# Altium PCB Main.PcbDoc (part 2 of 2)
Units mil, origin at the board's own origin, x right, y up, seen from the top; angles counter-clockwise.
Board outline 5000 x 4200 mil, 4 copper layers (Top Layer, Gnd 1, Power, Gnd 2), stack 62.4 mil thick; 161 components, 127 nets, 645 pads, 533 vias.
Unrouted connection lines stored in the file: 1.
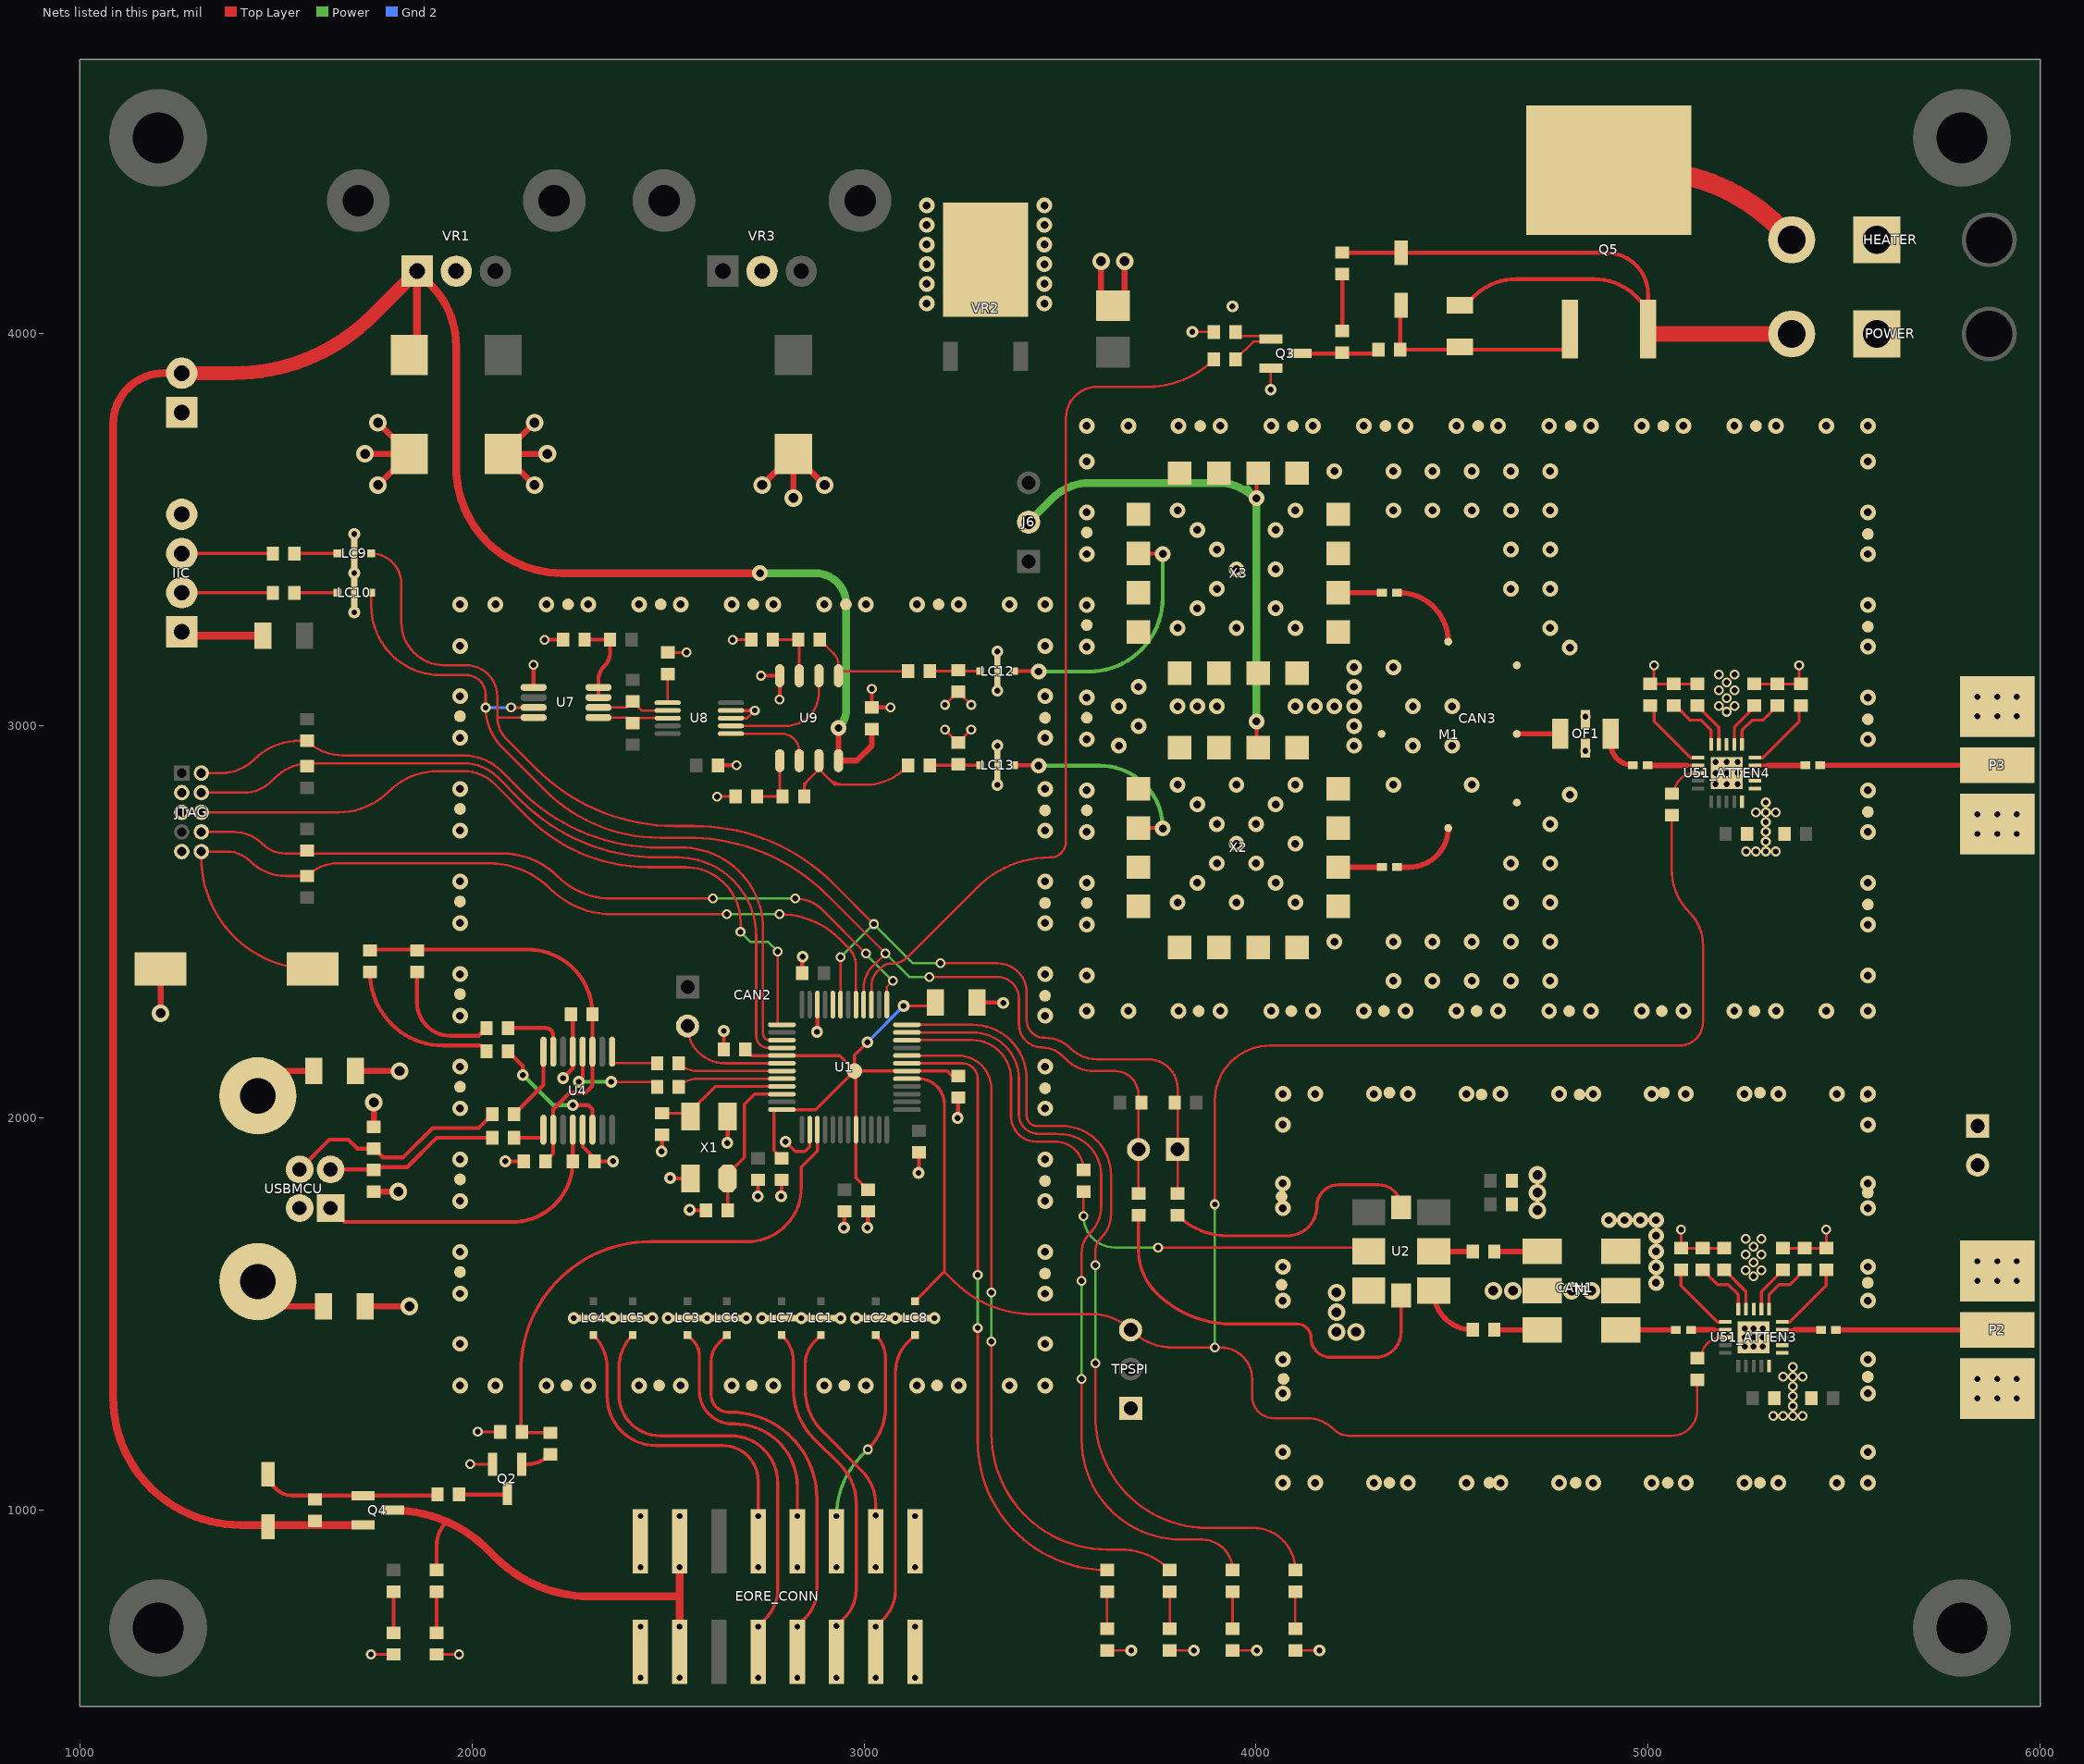
[diagram p4: the nets of this part, all layers, seen from the top]

## Via types
v1: diameter 40, hole 20, Top Layer to Gnd 2, tented both sides, 278 vias
v2: diameter 25, hole 15, Top Layer to Gnd 2, tented both sides, 147 vias
v3: diameter 30, hole 15, Top Layer to Gnd 2, tented both sides, 58 vias
v4: diameter 45, hole 25, Top Layer to Gnd 2, tented both sides, 31 vias
v5: diameter 25, hole 15, Top Layer to Gnd 2, 18 vias
v6: diameter 50, hole 30, Top Layer to Gnd 2, tented both sides, 1 vias

## Nets (pads, with @x,y where several pads share a name; then routed paths per layer and width w, separated by ;. In a path a pad name is that pad's centre, name@x,y a point inside that pad or via, vN(x,y) a via of type N, cw(c..) or ccw(c..) an arc to the next point about the centre after c; other vN are vias at no path point) (continued)
DATA: LC8.1 R57_ATTEN3.2 R57_ATTEN4.2 TPSPI.3 U1.17 | length 5427.6
  Top Layer w6: 3205,1608.31 3230,1583.31 ccw(c3431.12,1784.43) 3431.12,1500 3583.43,1500 cw(c3583.43,1363.43) TPSPI.3@3680,1460 ccw(c3788.64,1568.64) 3788.64,1415 v2(3895,1415) 3910,1415 cw(c3910,1335) 3990,1335 3990,1290 ccw(c4045,1290) 4045,1235 4127.57,1235 cw(c4127.57,1132.57) 4200,1205 ccw(c4236.21,1241.21) 4236.21,1190 5060,1190 ccw(c5060,1255) 5125,1255 R57_ATTEN3.2@5125,1332.44 ; v2(3895,1780) 3895,2045 cw(c4035,2045) 4000.27,2180.62 cw(c4035,2045) 4035,2185 5080,2185 ccw(c5080,2245) 5140,2245 5140,2440.5 ccw(c5020.5,2440.5) 5105,2525 cw(c5213.64,2633.64) 5060,2633.64 R57_ATTEN4.2@5060,2772.44
  Top Layer w8: U1.17@3109.45,2100.47 3139.53,2100.47 cw(c3139.53,2035) 3174.91,2090.09 cw(c3139.53,2035) 3185.35,2081.77 cw(c3139.53,2035) 3205,2035 3205,1608.31 LC8.1@3130,1533.31
  Power w6: v2(3895,1415) v2(3895,1780)
GND: C4.1 C5.1 C6.1 C7.1 C8.1 C9.1 C10.1 C11.1 C14.1 C15.1 C16.1 C18.1 C19.1 C20.1 C21.1 C22.1 C54_ATTEN3.1 C54_ATTEN4.1 C56_ATTEN3.1 C56_ATTEN4.1 CAN1.1 CAN2.1 CAN3.1 CB6.2 CB7.2 CB8.2 CBP2.2 CR3.2 CR4.2 CU1.1 CU2.1 CU3.1 CX1.1 CX2.1 EORE_CONN.1 EORE_CONN.2 EORE_CONN.15 EORE_CONN.16 GND.1 GND.2 HEATER.1 IIC.4 J5.1 JTAG.3 JTAG.5 JTAG.9 LC1.2 LC2.2 LC3.2 LC4.2 LC5.2 LC6.2 LC7.2 LC8.2 LC9.2 LC10.2 LC12.2 LC13.2 M1.4 M1.5 M1.6 OF1.2 OF1.4 P2.2 P3.2 Pow1.1 POWER.1 Q2.2 Q3.2 R19.2 R21.1 R45.1 R51_ATTEN3.2 R51_ATTEN4.2 R52_ATTEN3.2 R52_ATTEN4.2 R53_ATTEN3.2 R53_ATTEN4.2 R54_ATTEN3.2 R54_ATTEN4.2 R55_ATTEN3.2 R55_ATTEN4.2 R56_ATTEN3.2 R56_ATTEN4.2 RC3.1 RC4.1 RD8.2 RD9.2 RD10.2 RESET.2 RG2.1 RL1.2 RL2.2 RLED8.2 T1.2 T1.3 T1.5 TPSPI.1 U1.2 U1.34 U2.3 U4.5 U4.13 U7.1 U8.3 U8.4 U9.4 U51_ATTEN3.10 U51_ATTEN3.11 U51_ATTEN3.12 U51_ATTEN3.18 U51_ATTEN3.21 U51_ATTEN4.10 U51_ATTEN4.11 U51_ATTEN4.12 U51_ATTEN4.18 U51_ATTEN4.21 USBMCU.4 VR1.2 VR2.4 VR3.2 X1.2 X1.4 X2.1 X2.3 X2.4 X2.5 X2.6 X2.7 X2.8 X2.9 X2.11 X2.12 X2.13 X2.15 X2.16 X3.1 X3.3 X3.4 X3.5 X3.6 X3.7 X3.8 X3.9 X3.11 X3.12 X3.13 X3.15 X3.16 | length 4900.6
  Top Layer w6: RD8.2@3620,642.44 v3(3681.57,642.44) ; RD9.2@3780,642.44 v3(3841.57,642.44) ; v3(3837.44,4005) R45.1@3892.44,4005 ; RL2.2@3940,642.44 v3(4001.57,642.44) ; v3(4037.6,3857.6) Q3.2@4037.6,3912.6 ; RL1.2@4100,642.44 v3(4161.57,642.44)
  Top Layer w7: v2(1742.56,632.44) RLED8.2@1800,632.44 ; RD10.2@1910,632.44 v2(1967.44,632.44) ; v2(1995.16,1117.4) Q2.2@2052.6,1117.4 ; v2(2015,1200) RG2.1@2072.44,1200 ; J5.1@2500,3187.56 v2(2547.44,3187.56) ; v2(2625,2820) R21.1@2672.44,2820 ; U8.3@2660.71,3020 2701.73,3020 v2(2721.42,3039.68) ; v2(2665,3220) R19.2@2712.44,3220 ; v2(3206.45,2991.1) C21.1@3240,2957.56 v2(3273.55,2991.1) ; v2(3206.45,3053.9) C22.1@3240,3087.44 v2(3273.55,3053.9) ; v2(5015,3155) 5015,3107.56 R55_ATTEN4.2@5125,3107.56 ; v2(5084,1715.77) R54_ATTEN3.2@5084,1668.33 R55_ATTEN3.2@5194,1668.33 ; R51_ATTEN4.2@5275,3107.56 5385,3107.56 v2(5385,3155) ; R51_ATTEN3.2@5344,1668.33 R52_ATTEN3.2@5454,1668.33 v2(5454,1715.77)
  Top Layer w8: U8.4@2660.71,3039.68 v2(2721.42,3039.68) ; v3(2800,1940) 2825,1915 2850,1915 2861.42,1926.42 U1.2@2861.42,1970.55
  Top Layer w10: v3(2085,1890) CU2.1@2132.44,1890 ; U7.1@2157.32,3098.39 v2(2157.32,3155.83) ; v2(2185,3220) C18.1@2232.44,3220 ; v3(2232.5,2101.97) 2257.5,2126.97 U4.5@2257.5,2169.41 CU3.1@2257.5,2259.94 ; U4.13@2282.5,1970.59 2282.5,1927.5 CU1.1@2310,1900 ; CU1.1@2312.56,1890 v3(2360,1890) ; v3@2485,1915.43 CX2.1@2485,1957.44 ; v3@2505.75,1846.26 X1.4@2557.76,1846.26 ; v3@2555.43,1765 CX1.1@2597.44,1765 ; C19.1@2627.56,2900 v2(2675,2900) ; C14.1@2642.44,2175 v3(2642.44,2222.44) ; v3@2652.24,1936.73 X1.2@2652.24,2003.74 ; v3@2730,1800.43 C6.1@2730,1842.44 ; v2(2737.56,3128.27) U9.4@2785,3128.27 v2(2785,3067.56) ; v3@2790,1800.43 C11.1@2790,1842.44 ; C15.1@2842.44,2370 v3@2842.44,2412.01 ; v3@2881.1,2220 U1.34@2881.1,2289.45 ; v3@2950,1720.43 C7.1@2950,1762.44 ; v3@3010,1720.43 C8.1@3010,1762.44 ; v2(3020,3095) C20.1@3020,3047.56 v2(3067.44,3047.56) ; v3@3140,1860.43 C16.1@3140,1912.44 ; v3@3240,2000.43 C10.1@3240,2052.44 ; C9.1@3288.15,2295 v3@3355.16,2295
  Top Layer w15: v4(1206.1,2267.44) RESET.2@1206.1,2380 ; RC3.1@1703.15,2120 v4(1815.71,2120) ; v4(1727.44,3694.02) CB8.2@1840,3694.02 ; RC4.1@1728.15,1520 v4(1840.71,1520) ; CR3.2@1750,1812.44 v4(1812.56,1812.44) ; CR4.2@1750,1977.56 v4(1750,2040.12) ; v4(1760.41,3614.42) CB8.2@1840,3694.02 ; v4(1760.41,3773.61) CB8.2@1840,3694.02 ; v4(2159.59,3614.42) CB7.2@2080,3694.02 ; v4(2159.59,3773.61) CB7.2@2080,3694.02 ; v4(2192.56,3694.02) CB7.2@2080,3694.02 ; v4(2740.41,3614.42) CB6.2@2820,3694.02 ; v4(2820,3581.46) CB6.2@2820,3694.02 ; v4(2899.59,3614.42) CB6.2@2820,3694.02 ; CBP2.2@3604.76,4072.83 v4(3604.76,4185.39) ; CBP2.2@3664.76,4072.83 v4(3664.76,4185.39)
  other v1: 4068.19,1069.68 4150.87,1069.68 4300.47,1069.68 4387.09,1069.68 4536.69,1069.68 4623.31,1069.68 4772.91,1069.68 4859.53,1069.68 5009.13,1069.68 5095.75,1069.68 5245.35,1069.68 5331.97,1069.68 5481.57,1069.68 5560.31,1069.68 4068.19,1148.43 5560.31,1148.43 4068.19,1298.03 5560.31,1298.03 1969.68,1318.19 2060.24,1318.19 2190.16,1318.19 2296.46,1318.19 2426.38,1318.19 2532.68,1318.19 2662.6,1318.19 2768.9,1318.19 2898.82,1318.19 3005.12,1318.19 3135.04,1318.19 3241.34,1318.19 3371.26,1318.19 3461.81,1318.19 4068.19,1384.65 5560.31,1384.65 1969.68,1424.49 3461.81,1424.49 4068.19,1534.25 5560.31,1534.25 1969.68,1552.44 3461.81,1552.44 5020,1580 5020,1620 4068.19,1620.87 5560.31,1620.87 1969.68,1658.74 3461.81,1658.74 5020,1660 5020,1700 4900,1740 4940,1740 4980,1740 5020,1740 4068.19,1770.47 5560.31,1770.47 1969.68,1788.66 3461.81,1788.66 4068.19,1833.46 5560.31,1833.46 1969.68,1894.96 3461.81,1894.96 4068.19,1983.07 5560.31,1983.07 1969.68,2024.88 3461.81,2024.88 4068.19,2061.81 4150.87,2061.81 4300.47,2061.81 4387.09,2061.81 4536.69,2061.81 4623.31,2061.81 4772.91,2061.81 4859.53,2061.81 5009.13,2061.81 5095.75,2061.81 5245.35,2061.81 5331.97,2061.81 5481.57,2061.81 5560.31,2061.81 1969.68,2131.18 3461.81,2131.18 1969.68,2261.1 3461.81,2261.1 3568.19,2273.19 3674.49,2273.19 3802.44,2273.19 3908.74,2273.19 4038.66,2273.19 4144.96,2273.19 4274.88,2273.19 4381.18,2273.19 4511.1,2273.19 4617.4,2273.19 4747.32,2273.19 4853.62,2273.19 4983.54,2273.19 5089.84,2273.19 5219.76,2273.19 5326.06,2273.19 5454.02,2273.19 5560.31,2273.19 4350,2350 4450,2350 4550,2350 4650,2350 4750,2350 3568.19,2363.74 5560.31,2363.74 1969.68,2367.4 3461.81,2367.4 4200,2450 4350,2450 4450,2450 4550,2450 4650,2450 4750,2450 3568.19,2493.66 5560.32,2493.66 1969.68,2497.32 3461.81,2497.32 3800,2550 3950,2550 4100,2550 4650,2550 4750,2550 3568.19,2599.96 3850,2600 4050,2600 5560.32,2599.96 1969.68,2603.62 3461.81,2603.62 3900,2650 4000,2650 4650,2650 4750,2650 3950,2700 4100,2700 3568.19,2729.88 5560.32,2729.88 1969.68,2733.54 3461.81,2733.54 3900,2750 4000,2750 4750,2750 3850,2800 4050,2800 4800,2825 3568.19,2836.18 5560.32,2836.18 1969.68,2839.84 3461.81,2839.84 3800,2850 3950,2850 4100,2850 4350,2850 4550,2850 3650,2950 4250,2950 4400,2950 4500,2950 3568.19,2966.1 5560.32,2966.1 1969.68,2969.76 3461.81,2969.76 3700,3000 4250,3000 3650,3050 3800,3050 3850,3050 3900,3050 4100,3050 4150,3050 4200,3050 4250,3050 4400,3050 4500,3050 3568.19,3072.4 5560.32,3072.4 1969.68,3076.06 3461.81,3076.06 3700,3100 4250,3100 4250,3150 4350,3150 4800,3200 3568.19,3202.32 5560.32,3202.32 1969.68,3204.02 3461.81,3204.02 3800,3250 3950,3250 4100,3250 4750,3250 3850,3300 4050,3300 3568.19,3308.62 5560.32,3308.62 1969.69,3310.32 2060.24,3310.32 2190.16,3310.32 2296.46,3310.32 2426.38,3310.32 2532.68,3310.32 2662.6,3310.32 2768.9,3310.32 2898.82,3310.32 3005.12,3310.32 3135.04,3310.32 3241.34,3310.32 3371.26,3310.32 3461.81,3310.31 3900,3350 4650,3350 4750,3350 3950,3400 4050,3400 3568.19,3438.54 5560.32,3438.54 3900,3450 4650,3450 4750,3450 3850,3500 4050,3500 3568.19,3544.84 5560.32,3544.84 3800,3550 4100,3550 4350,3550 4450,3550 4550,3550 4650,3550 4750,3550 4200,3650 4350,3650 4450,3650 4550,3650 4650,3650 4750,3650 3568.19,3674.76 5560.31,3674.76 3568.19,3765.32 3674.49,3765.32 3802.44,3765.32 3908.74,3765.32 4038.66,3765.32 4144.96,3765.32 4274.88,3765.32 4381.18,3765.32 4511.1,3765.32 4617.4,3765.32 4747.32,3765.32 4853.62,3765.32 4983.54,3765.32 5089.84,3765.32 5219.76,3765.32 5326.06,3765.32 5454.02,3765.32 5560.31,3765.31 3160,4077.8 3460,4077.8 3160,4127.8 3460,4127.8 3160,4177.8 3460,4177.8 3160,4227.8 3460,4227.8 3160,4277.8 3460,4277.8 3160,4327.8 3460,4327.8
  other v2: 2430,573 3130,573 2430,703 3130,703 2430,855 3130,855 2430,985 3130,985 5319,1240.77 5344,1240.77 5369,1240.77 5394,1240.77 5369,1265.77 5369,1290.77 5369,1315.77 5344,1340.77 5369,1340.77 5394,1340.77 5369,1365.77 5269,1597.07 5249,1612.07 5289,1612.07 5269,1632.07 5249,1652.07 5289,1652.07 5269,1672.07 5249,1692.07 5289,1692.07 5250,2680 5275,2680 5300,2680 5325,2680 5300,2705 5300,2730 5300,2755 5275,2780 5300,2780 5325,2780 5300,2805 4840,2936.5 4840,3023.5 5200,3036.3 5180,3051.3 5220,3051.3 5200,3071.3 5180,3091.3 5220,3091.3 5200,3111.3 5180,3131.3 5220,3131.3
  other v3: 2260,1490 2360,1490 2460,1490 2500,1490 2600,1490 2700,1490 2740,1490 2840,1490 2940,1490 2980,1490 3080,1490 3180,1490 2948.9,1720.43 3008.9,1720.43 2555.43,1766.1 2728.9,1800.43 2788.9,1800.43 2505.75,1847.36 3138.9,1860.43 2483.9,1915.43 2651.14,1936.73 3238.9,2000.43 2880,2220 3355.16,2293.9 2843.54,2412.01 3340,2850 3340,2950 3340,3090 3340,3190 1700,3290 1700,3390 1700,3490 3939.76,4069.9
  other v4: 4205,1455 4255,1455 4205,1505 4205,1555 4605,1560 4655,1560 4805,1560 4855,1560 4717.56,1765 4717.56,1810 4717.56,1855
  other v5: 5246,1417.77 5269,1417.77 5292,1417.77 5246,1440.77 5269,1440.77 5292,1440.77 5246,1463.77 5269,1463.77 5292,1463.77 5172,2852 5200,2852 5228,2852 5172,2880 5200,2880 5228,2880 5172,2908 5200,2908 5228,2908
HEAT: R43.1 U1.27 U1.32 | length 2219.1
  Top Layer w6: U1.27@3018.9,2289.45 3018.9,2335 cw(c3078.9,2335) 3030.6,2370.6 3043.17,2383.17 cw(c3070.1,2356.23) 3070.1,2394.33 ccw(c3070.1,2452.8) 3078.96,2395 ccw(c3070.1,2452.8) 3111.45,2411.45 3287.22,2587.22 cw(c3475,2399.44) 3475,2665 ccw(c3475,2705) 3515,2705 3515,3785 cw(c3595,3785) 3595,3865 3723.45,3865 ccw(c3723.45,4104) R43.1@3892.44,3935
HEAT_PWR: D17.1 D18.1 POWER.2 Q5.3 R49.2 | length 1831.8
  Top Layer w10: D17.1@4220,4207.56 4220,4206.93 D18.1@4370,4206.93 4893.07,4206.93 cw(c4893.07,4100) 5000,4100 Q5.3@5000,4065 ; R49.2@4520,4073.15 ccw(c4520,4104.9) 4542.45,4082.45 4555,4095 cw(c4663.64,3986.36) 4663.64,4140 4861.36,4140 cw(c4861.36,3986.36) 4970,4095 Q5.3@5000,4065 ; Q5.3@5000,4011.97 Q5.3@5000,4065
  Top Layer w40: Q5.3@5000,4011.97 5000,4000 POWER.2@5366,4000
LV_CLK: EORE_CONN.12 LC2.1 | length 504.2
  Top Layer w8: v2(3010,1155) ccw(c2901.36,1263.64) 3055,1263.64 3055,1386.34 ccw(c2969.64,1386.34) 3030.08,1446.62 ccw(c2969.64,1386.34) LC2.1@3030,1446.69
  Power w8: v2(2930,985) cw(c3147.28,985) 2993.64,1138.64 v2(3010,1155)
  other v2: 2930,855
LV_CS_1: EORE_CONN.14 LC1.1 | length 601.3
  Top Layer w8: LC1.1@2890,1446.69 2875,1431.69 ccw(c2935.36,1371.34) 2874.96,1431.66 ccw(c2935.36,1371.34) 2850,1371.34 2850,1308.64 ccw(c3003.64,1308.64) 2895,1200 2994.64,1100.36 cw(c2909.29,1015) 3030,1015 EORE_CONN.14@3030,921
  other v2: 3030,855 3030,987
LV_CS_2: EORE_CONN.11 LC7.3 | length 819.4
  Top Layer w8: LC7.3@2790,1446.69 2794.05,1442.64 cw(c2731.42,1380) 2820,1380 2820,1308.49 ccw(c2997.43,1308.49) 2871.97,1183.03 2940,1115 cw(c2843.43,1018.43) 2980,1018.43 2980,797.43 cw(c2877.57,797.43) 2950,725 v2(2930,705)
  other v2: 2930,573
LV_CS_3: EORE_CONN.9 LC6.1 | length 927.8
  Top Layer w8: 2629.98,1426.67 ccw(c2678.28,1378.41) 2610,1378.41 2610,1295 ccw(c2655,1295) 2655,1250 2660.07,1250 cw(c2660.07,1030.24) 2792.09,1205.92 cw(c2660.07,1030.24) 2879.83,1030.24 2879.83,1029.99 cw(c2641.01,1021.01) 2880,1021.01 2880,797.43 cw(c2777.57,797.43) 2850,725 EORE_CONN.9@2830,705 ; 2630,1426.69 LC6.1@2650,1446.69
  other v2: 2830,573 2830,703
LV_SW_1: EORE_CONN.7 LC5.1 | length 1075.8
  Top Layer w8: LC5.1@2410,1446.69 ccw(c2494.5,1362.2) LC5.1@2410,1446.69 ccw(c2494.5,1362.2) 2375,1362.2 2375,1295 ccw(c2480,1295) 2480,1190 2660,1190 cw(c2660,1070) 2780,1070 2780,797.43 cw(c2677.57,797.43) 2750,725 EORE_CONN.7@2730,705
  other v2: 2730,573 2730,703
LV_SW_2: EORE_CONN.8 LC4.3 | length 827.8
  Top Layer w8: LC4.3@2310,1446.69 cw(c2225.5,1362.2) 2345,1362.2 2345,1290 ccw(c2470,1290) 2368.55,1216.97 ccw(c2470,1290) 2470,1165 2640,1165 cw(c2640,1075) 2730,1075 v2(2730,985) EORE_CONN.8@2730,921
  other v2: 2730,855
LV_SW_3: EORE_CONN.10 LC3.3 | length 680.8
  Top Layer w8: LC3.3@2550,1446.69 2565,1431.69 cw(c2528.79,1395.48) 2580,1395.48 2580,1305 ccw(c2665,1305) 2665,1220 2670,1220 cw(c2670,1060) 2830,1060 v2(2830,985) EORE_CONN.10@2830,921
  other v2: 2830,855
MIXERV+: J6.2 X2.14 X3.14 | length 1350.5
  Top Layer w10: X2.14@4001.1,2950 v1(4001.1,3012.01) ; v1(4001.1,3580.79) X3.14@4001.1,3642.79
  Power w20: J6.2@3420,3520 3481.11,3581.11 cw(c3575,3487.22) 3575,3620 3904.61,3620 cw(c3904.61,3493.65) v1@3993.95,3582.99 ; 3977.88,3604.01 ccw(c4083.26,3667.95) v1@3993.95,3582.99 ; v1@3996.1,3580.79 cw(c4083.26,3667.95) v1@3993.95,3582.99 ; v1@3998.6,3583.29 v1(4001.1,3580.79) v1(4001.1,3012.01) v1@4001.1,3007.01
ND_EN: RG1.1 RG2.2 U1.3 | length 1375
  Top Layer w8: RG2.2@2125,1200 2125,1355 cw(c2455,1355) 2455,1685 2702.5,1685 ccw(c2702.5,1822.5) 2776.81,1706.81 ccw(c2702.5,1822.5) 2818.19,1748.19 ccw(c2702.5,1822.5) 2840,1822.5 2840,1875 2881.1,1916.1 U1.3@2881.1,1970.55 ; RG2.2@2127.56,1200 ccw(c2133.45,1205.89) 2133.45,1197.56 RG1.1@2200,1197.56
NetC1_1: C1.1 U2.4 | length 156.9
  Top Layer w13.45: U2.4@4452.68,1559.76 ccw(c4552.44,1559.76) C1.1@4552.44,1460
  Top Layer w30: U2.4@4452.68,1559.76 U2.4@4452.68,1560
NetC1_2: C1.2 T1.6 | length 110
  Top Layer w13.45: C1.2@4620,1460 T1.6@4730,1460
NetC2_1: C2.1 U2.5 | length 99.8
  Top Layer w13.45: U2.5@4452.68,1660 C2.1@4552.44,1660
NetC2_2: C2.2 T1.4 | length 105
  Top Layer w13.45: 4625,1660 T1.4@4730,1660
NetC18_2: C18.2 R16.1 U7.7 U7.8 | length 220
  Top Layer w10: C18.2@2287.56,3220 R16.1@2352.44,3220 2352.44,3188.49 cw(c2301.63,3188.49) 2337.56,3152.56 ccw(c2373.49,3116.63) 2322.68,3116.63 U7.7@2322.68,3072.8
NetC21_2: C21.2 LC13.1 R24.1 | length 129.1
  Top Layer w8: R24.1@3167.56,2900 LC13.1@3296.69,2900
NetC22_2: C22.2 LC12.1 R23.1 | length 129.1
  Top Layer w8: R23.1@3167.56,3140 LC12.1@3296.69,3140
NetC28_1: C28.1 T1.1 | length 141
  Top Layer w13.45: T1.1@4930,1460 C28.1@5070.98,1460
NetC30_1: C30.1 OF1.3 | length 112.5
  Top Layer w13.45: OF1.3@4904,2980 4904,2956.98 ccw(c4960.98,2956.98) C30.1@4960.98,2900
NetC32_2: C32.2 M1.1 | length 202.3
  Top Layer w13.45: C32.2@4359.02,3340 4365,3340 cw(c4365,3215) M1.1@4490,3215
NetC33_2: C33.2 M1.2 | length 188.1
  Top Layer w13.45: C33.2@4359.02,2640 4390,2640 ccw(c4390,2740) M1.2@4490,2740
NetCU1_2: CU1.2 U4.12 USBMCU.1 | length 814.7
  Top Layer w10: USBMCU.1@1639.37,1770.79 1675.16,1735 2102.5,1735 ccw(c2102.5,1890) 2245.71,1830.71 ccw(c2102.5,1890) 2257.5,1890 U4.12@2257.5,1970.59
  Top Layer w25: USBMCU.1@1638.14,1758.14 ccw(c1573.58,1770.79) USBMCU.1@1639.37,1770.79
NetCX1_2: CX1.2 U1.46 X1.1 | length 394.2
  Top Layer w8: CX1.2@2652.56,1765 2652.24,1765.32 X1.1@2652.24,1846.26 2652.24,1857.24 2695,1900 2695,2035 2721.1,2061.1 U1.46@2790.55,2061.1
NetCX2_2: CX2.2 U1.45 X1.3 | length 333.8
  Top Layer w8: CX2.2@2485,2012.56 2552.56,2012.56 2620.79,2080.79 U1.45@2790.55,2080.79
NetD1_1: D1.1 U1.24 | length 2139.2
  Top Layer w6: U1.24@3109.45,2238.27 3276.73,2238.27 cw(c3276.73,2100) 3415,2100 3415,2006.31 ccw(c3441.31,2006.31) 3441.31,1980 3505,1980 cw(c3505,1855) 3567.89,1963.03 cw(c3505,1855) 3630,1855 3630,1755.36 cw(c3544.64,1755.36) 3605,1695 ccw(c3641.21,1658.79) 3590,1658.79 v2(3590,1625) ; v2(3590,1375) 3590,1240 ccw(c3875,1240) 3708.14,1008.95 ccw(c3875,1240) 3875,955 3992.56,955 cw(c3992.56,847.56) D1.1@4100,847.56
  Power w6: v2(3590,1375) v2(3590,1625)
NetD1_2: D1.2 RL1.1 | length 92.4
  Top Layer w6: RL1.1@4100,697.56 D1.2@4100,790
NetD2_1: D2.1 U1.23 | length 2004.2
  Top Layer w6: U1.23@3109.45,2218.58 3276.42,2218.58 cw(c3276.42,2100) 3395,2100 3395,2010 ccw(c3445,2010) 3445,1960 3480,1960 cw(c3480,1685) 3500.19,1959.26 cw(c3500.19,1854.45) 3524.81,1956.32 cw(c3500.19,1854.45) 3605,1854.45 3605,1777.43 cw(c3502.57,1777.43) 3575,1705 ccw(c3623.28,1656.72) 3555,1656.72 v2(3555,1585) ; v2(3555,1335) 3555,1180 ccw(c3810,1180) 3810,925 3862.56,925 cw(c3862.56,847.56) D2.1@3940,847.56
  Power w6: v2(3555,1335) v2(3555,1585)
NetD2_2: D2.2 RL2.1 | length 92.4
  Top Layer w6: RL2.1@3940,697.56 D2.2@3940,790
NetD5_1: D5.1 U1.19 | length 1644.1
  Top Layer w6: U1.19@3109.45,2139.84 3250.16,2139.84 cw(c3250.16,2100) 3290,2100 v2(3290,1600) ; v2(3290,1465) 3290,1177.56 ccw(c3620,1177.56) D5.1@3620,847.56
  Power w6: v2(3290,1465) v2(3290,1600)
NetD5_2: D5.2 RD8.1 | length 92.4
  Top Layer w6: RD8.1@3620,697.56 D5.2@3620,790
NetD6_1: D6.1 U1.20 | length 1781
  Top Layer w6: U1.20@3109.45,2159.53 3240,2159.53 cw(c3240,2074.53) 3325,2074.53 v2(3325,1555) ; v2(3325,1430) 3325,1195 ccw(c3620,1195) 3620,900 3653.4,900 cw(c3653.4,720.96) D6.1@3780,847.56
  Power w6: v2(3325,1430) v2(3325,1555)
NetD6_2: D6.2 RD9.1 | length 92.4
  Top Layer w6: RD9.1@3780,697.56 D6.2@3780,790
NetD7_1: D7.1 EORE_CONN.3 EORE_CONN.4 Q4.3 | length 1206.6
  Top Layer w10: D7.1@1910,847.56 1910,909.58 cw(c1996.99,909.58) 1935.48,971.1
  Top Layer w20: Q4.3@1797.4,1000 cw(c1797.4,655.74) 1935.48,971.1 cw(c1797.4,655.74) 2040.83,899.17 2060,880 ccw(c2301.42,1121.42) 2301.42,780 2530,780 ; EORE_CONN.3@2530,639 2530,780 ; EORE_CONN.4@2530,921 2530,780
  other v2: 2530,573 2530,703 2530,855 2530,985
NetD7_2: D7.2 RD10.1 | length 92.4
  Top Layer w10: RD10.1@1910,687.56 D7.2@1910,780
NetD8_2: D8.2 Q4.1 R46.1 R47.1 | length 461.3
  Top Layer w10: D8.2@1480,1091.93 ccw(c1520.87,1091.93) 1491.97,1063.03 1500,1055 ccw(c1542.49,1097.49) 1542.49,1037.4 Q4.1@1722.6,1037.4 1906.17,1037.4 ccw(c1906.17,1046.27) R47.1@1912.44,1040
NetD17_2: D17.2 RD19.1 | length 144.9
  Top Layer w10: RD19.1@4220,4007.56 D17.2@4220,4152.44
NetD18_2: D18.2 Q5.1 R48.1 R49.1 | length 599.9
  Top Layer w10: D18.2@4370,4073.07 4367.56,4073.07 R48.1@4367.56,3960 4800,3960 Q5.1@4800,4011.97
NetDRX_2: DRX.2 RU4.1 | length 410.6
  Top Layer w10: DRX.2@1740,2372.44 ccw(c1927.44,2372.44) 1927.44,2185 2022.44,2185 RU4.1@2037.44,2170
NetDTX_2: DTX.2 RU3.1 | length 311.7
  Top Layer w10: DTX.2@1860,2372.44 1860,2295 ccw(c1945,2295) 1945,2210 2017.44,2210 RU3.1@2037.44,2230
NetEORE_CONN_13: EORE_CONN.13 LC8.3 | length 776
  Top Layer w8: v2(3030,703) 3050,723 ccw(c2977.57,795.43) 3080,795.43 3080,1351.04 cw(c3190.22,1351.04) 3090,1396.91 cw(c3190.22,1351.04) 3112.25,1428.94 ; 3112.28,1428.98 LC8.3@3130,1446.69
  other v2: 3030,573
NetERASE_2: ERASE.2 U1.42 | length 294.9
  Top Layer w6: ERASE.2@2550,2235 ccw(c2645.16,2235) 2645.16,2139.84 U1.42@2790.55,2139.84
NetHEATER_2: HEATER.2 Q5.4 | length 529.4
  Top Layer w50: Q5.4@4900,4417.48 4981.41,4417.48 cw(c4981.41,3917.48) 5334.97,4271.03 HEATER.2@5366,4240 HEATER.2@5354.59,4240
NetIIC_1: IIC.1 R44.1 | length 216.9
  Top Layer w20: IIC.1@1260,3240 1260,3230 R44.1@1466.85,3230
NetIIC_2: IIC.2 R41.2 | length 232.4
  Top Layer w8: IIC.2@1260,3340 R41.2@1492.44,3340
NetIIC_3: IIC.3 R42.2 | length 232.4
  Top Layer w8: IIC.3@1260,3440 R42.2@1492.44,3440
NetJ1_1: J1.1 U2.8 | length 1034.2
  Top Layer w8: J1.1@3700,1752.44 3700,1663.64 ccw(c3853.64,1663.64) 3745,1555 ccw(c3938.14,1748.14) 3938.14,1475 4105,1475 cw(c4105,1440) 4140,1440 ccw(c4190,1440) 4148.1,1412.72 ccw(c4190,1440) 4190,1390 4305,1390 ccw(c4305,1455) 4370,1455 U2.8@4370,1547.7
NetJ2_1: J2.1 U2.7 | length 691.2
  Top Layer w8: J2.1@3800,1752.44 ccw(c3926.6,1879.04) 3926.6,1700 4080,1700 ccw(c4080,1775) 4154.22,1764.22 ccw(c4080,1775) 4155,1775 cw(c4210,1775) 4210,1830 4312.3,1830 cw(c4312.3,1772.3) U2.7@4370,1772.3
NetJ3_1: J3.1 U2.2 | length 838.1
  Top Layer w6: v2(3560,1750) J3.1@3560,1812.44 ; v2(3750,1670) 4263.18,1670 cw(c4263.18,1635.86) U2.2@4287.32,1660
  Power w6: v2(3560,1750) ccw(c3640,1750) 3640,1670 v2(3750,1670)
NetJ5_2: J5.2 U8.6 | length 73.4
  Top Layer w6: U8.6@2499.29,3059.37 2499.29,3131.73 J5.2@2500,3132.44
NetLC9_3: LC9.3 R42.1 | length 119.4
  Top Layer w8: R42.1@1545,3440 LC9.3@1664.43,3440
NetLC10_1: LC10.1 R41.1 | length 104.7
  Top Layer w8: R41.1@1545,3340 LC10.1@1649.68,3340
NetLC12_3: LC12.3 X3.2 | length 660
  Top Layer w10: LC12.3@3383.31,3140 v1@3445.31,3140 ; X3.2@3700,3440 v1@3762.01,3440
  Power w10: v1(3445.31,3138.9) 3573.9,3138.9 ccw(c3573.9,3327.01) 3762.01,3327.01 v1(3762.01,3438.9)
NetLC13_3: LC13.3 X2.2 | length 532
  Top Layer w10: LC13.3@3383.31,2900 v1@3445.31,2900 ; X2.2@3700,2740 v1@3762.01,2740
  Power w10: v1(3445.31,2898.9) 3602.01,2898.9 cw(c3602.01,2738.9) v1(3762.01,2738.9)
NetLED8_2: LED8.2 RLED8.1 | length 92.4
  Top Layer w10: RLED8.1@1800,687.56 LED8.2@1800,780
NetM1_3: M1.3 OF1.1 | length 111
  Top Layer w13.45: M1.3@4665,2980 OF1.1@4776,2980
NetQ2_1: Q2.1 RG1.2 | length 79.3
  Top Layer w10: Q2.1@2127.4,1117.4 2139.55,1117.4 ccw(c2139.55,1202.89) RG1.2@2200,1142.44
NetQ2_3: Q2.3 R47.2 | length 125
  Top Layer w10: R47.2@1967.56,1040 2090,1040 Q2.3@2090,1042.6
NetQ3_1: Q3.1 R43.2 R45.2 | length 207.9
  Top Layer w6: R43.2@3947.56,3935 3992.56,3980 Q3.1@4040.2,3980 ; R45.2@3947.56,4005 3957.56,3995 Q3.1@4040,3995
NetQ3_3: Q3.3 R48.2 RD19.2 | length 210
  Top Layer w10: Q3.3@4112.4,3950 4312.44,3950 R48.2@4312.44,3960
NetR1_1: R1.1 U4.1 | length 144.4
  Top Layer w6: U4.1@2357.5,2169.41 2357.5,2140 R1.1@2472.44,2140
NetR8_1: R8.1 U4.4 | length 293.5
  Top Layer w6: v3(2355,2092.5) 2472.44,2092.5 R8.1@2472.44,2080
  Top Layer w10: v3(2272.5,2092.5) 2282.5,2102.5 U4.4@2282.5,2169.41
  Power w10: v3(2272.5,2092.5) v3(2355,2092.5)
NetR17_1: R17.1 U7.5 U8.8 | length 187.6
  Top Layer w6: U7.5@2322.68,3021.61 2395.95,3021.61 R17.1@2410,3007.56 2422.44,3020 U8.8@2499.29,3020
NetR18_1: R18.1 U7.6 U8.7 | length 192.4
  Top Layer w6: U7.6@2322.68,3047.2 2394.76,3047.2 R18.1@2410,3062.44 2432.76,3039.68 U8.7@2499.29,3039.68
NetR19_1: R19.1 R20.1 U9.3 | length 157.7
  Top Layer w7: R19.1@2767.56,3220 R20.1@2832.44,3220 2835,3217.44 U9.3@2835,3128.27
NetR20_2: R20.2 R23.2 U9.1 | length 298.7
  Top Layer w6: R20.2@2887.56,3220 2922.58,3184.98 ; 2922.61,3184.95 cw(c2892.61,3155) 2935,3155 U9.1@2935,3128.27 2935,3140 R23.2@3112.44,3140
NetR21_2: R21.2 R22.2 U9.5 | length 159.7
  Top Layer w7: R21.2@2727.56,2820 R22.2@2792.44,2820 2785,2827.44 U9.5@2785,2911.73
NetR22_1: R22.1 R24.2 U9.7 | length 445.5
  Top Layer w6: R22.1@2847.56,2825 R22.1@2847.56,2836.28 ; U9.7@2885,2911.73 U9.7@2885,2890 ; R24.2@3112.44,2900 3103.06,2890.62 cw(c3005,2988.67) 3005,2850 2953.28,2850 ; R22.1@2847.56,2836.28 cw(c2886.86,2836.28) 2859.06,2864.06 ; R22.1@2847.56,2836.28 2847.56,2852.56 2859.06,2864.06 ; 2859.07,2864.07 U9.7@2885,2890 ; U9.7@2885,2890 2905,2870 ; 2905,2870 ccw(c2953.28,2918.28) 2953.28,2850 ; 2905,2870 2925,2850 2953.28,2850
NetR51_ATTEN3_1: R51_ATTEN3.1 U51_ATTEN3.17 | length 122.7
  Top Layer w8: U51_ATTEN3.17@5288.69,1513.41 5288.69,1557.9 R51_ATTEN3.1@5344,1613.21
NetR51_ATTEN4_1: R51_ATTEN4.1 U51_ATTEN4.17 | length 122.7
  Top Layer w8: U51_ATTEN4.17@5219.69,2952.64 5219.69,2997.13 R51_ATTEN4.1@5275,3052.44
NetR52_ATTEN3_1: R52_ATTEN3.1 U51_ATTEN3.15 | length 190.9
  Top Layer w8: U51_ATTEN3.15@5341.64,1480.14 5360.93,1480.14 5454,1573.21 R52_ATTEN3.1@5454,1613.21
NetR52_ATTEN4_1: R52_ATTEN4.1 U51_ATTEN4.15 | length 190.9
  Top Layer w8: U51_ATTEN4.15@5272.64,2919.37 5291.93,2919.37 5385,3012.44 R52_ATTEN4.1@5385,3052.44
NetR53_ATTEN3_1: R53_ATTEN3.1 U51_ATTEN3.16 | length 153.5
  Top Layer w8: U51_ATTEN3.16@5308.37,1513.41 5308.37,1550.14 5334,1575.77 5361.56,1575.77 R53_ATTEN3.1@5399,1613.21
NetR53_ATTEN4_1: R53_ATTEN4.1 U51_ATTEN4.16 | length 153.5
  Top Layer w8: U51_ATTEN4.16@5239.37,2952.64 5239.37,2989.37 5265,3015 5292.56,3015 R53_ATTEN4.1@5330,3052.44
NetR54_ATTEN3_1: R54_ATTEN3.1 U51_ATTEN3.1 | length 190.9
  Top Layer w8: R54_ATTEN3.1@5084,1613.21 5084,1573.21 5177.07,1480.14 U51_ATTEN3.1@5196.36,1480.14
NetR54_ATTEN4_1: R54_ATTEN4.1 U51_ATTEN4.1 | length 190.9
  Top Layer w8: R54_ATTEN4.1@5015,3052.44 5015,3012.44 5108.07,2919.37 U51_ATTEN4.1@5127.36,2919.37
NetR55_ATTEN3_1: R55_ATTEN3.1 U51_ATTEN3.19 | length 122.7
  Top Layer w8: R55_ATTEN3.1@5194,1613.21 5249.32,1557.9 U51_ATTEN3.19@5249.32,1513.41
NetR55_ATTEN4_1: R55_ATTEN4.1 U51_ATTEN4.19 | length 122.7
  Top Layer w8: R55_ATTEN4.1@5125,3052.44 5180.31,2997.13 U51_ATTEN4.19@5180.31,2952.64
NetR56_ATTEN3_1: R56_ATTEN3.1 U51_ATTEN3.20 | length 153.5
  Top Layer w8: R56_ATTEN3.1@5139,1613.21 5176.44,1575.77 5204,1575.77 5229.63,1550.14 U51_ATTEN3.20@5229.63,1513.41
NetR56_ATTEN4_1: R56_ATTEN4.1 U51_ATTEN4.20 | length 153.5
  Top Layer w8: R56_ATTEN4.1@5070,3052.44 5107.44,3015 5135,3015 5160.63,2989.37 U51_ATTEN4.20@5160.63,2952.64
NetR57_ATTEN3_1: R57_ATTEN3.1 U51_ATTEN3.3 | length 91.7
  Top Layer w6: R57_ATTEN3.1@5135,1387.56 cw(c5188.21,1387.56) 5152.74,1427.23 cw(c5188.21,1387.56) 5188.21,1440.77 U51_ATTEN3.3@5196.36,1440.77
NetR57_ATTEN4_1: R57_ATTEN4.1 U51_ATTEN4.3 | length 91.7
  Top Layer w6: R57_ATTEN4.1@5066,2826.79 cw(c5119.21,2826.79) 5083.74,2866.45 cw(c5119.21,2826.79) 5119.21,2880 U51_ATTEN4.3@5127.36,2880
NetRC3_2: RC3.2 USBMCU.5 | length 169
  Top Layer w15: USBMCU.5@1453.94,2057.01 1516.93,2120 RC3.2@1596.85,2120
NetRC4_2: RC4.2 USBMCU.6 | length 194
  Top Layer w15: USBMCU.6@1453.94,1582.99 1516.93,1520 RC4.2@1621.85,1520
NetRU5_2: RU5.2 U4.8 | length 203
  Top Layer w10: RU5.2@2102.44,1997.44 RU5.2@2111.28,2006.28 ; RU5.2@2107.56,2010 2182.5,2084.94 U4.8@2182.5,2169.41
NetRU6_2: RU6.2 U4.9 | length 92.4
  Top Layer w10: RU6.2@2107.56,1950 2182.5,1950 U4.9@2182.5,1967.5
NetU8_1: U8.1 U9.6 | length 223.6
  Top Layer w6: U8.1@2660.71,2980.63 2789.37,2980.63 cw(c2789.37,2935) 2835,2935 U9.6@2835,2911.73
NetU8_2: U8.2 U9.2 | length 297.6
  Top Layer w6: U8.2@2660.71,3000.31 2800.31,3000.31 ccw(c2800.31,3085) 2858,3023 ccw(c2800.31,3085) 2862.31,3027.31 ccw(c2800.31,3085) 2885,3085 U9.2@2885,3110
OSC_EN: J3.2 U1.22 | length 680.5
  Top Layer w6: U1.22@3109.45,2198.9 3276.1,2198.9 cw(c3276.1,2100) 3375,2100 3375,2005 ccw(c3440,2005) 3440,1940 3487.56,1940 cw(c3487.56,1867.56) 3513.44,1935.22 cw(c3487.56,1867.56) J3.2@3560,1867.56
RAWV+: C20.2 CB8.1 D8.1 Pow1.2 Q4.2 R46.2 U9.8 VR1.1 | length 6728.5
  Top Layer w15: v1(2935,2995) U9.8@2935,2911.73 2981.73,2911.73 3020,2950 C20.2@3020,2992.44
  Top Layer w20: Pow1.2@1260,3900 1215,3900 ccw(c1215,3770) 1085,3770 1085,1287.6 ccw(c1410,1287.6) 1410,962.6 Q4.2@1722.6,962.6 ; CB8.1@1860,3945.98 VR1.1@1860,4160 1895,4125 cw(c1738.08,3968.08) 1960,3968.08 1960,3660 ccw(c2230,3660) 2230,3390 v1(2735,3390)
  Top Layer w35: Pow1.2@1260,3900 1392.89,3900 ccw(c1392.89,4400) 1746.45,4046.45 VR1.1@1860,4160
  Power w20: v1(2735,3390) 2875,3390 cw(c2875,3310) 2955,3310 2955,3043.28 cw(c2886.72,3043.28) v1(2935,2995)
RESET: JTAG.10 R6.1 RESET.1 U1.29 | length 2348.8
  Top Layer w6: RESET.1@1593.9,2380 cw(c1593.9,2663.9) 1310,2663.9 JTAG.10@1310,2680 1374.64,2680 cw(c1374.64,2594.64) 1435,2655 ccw(c1525.39,2745.39) 1525.39,2617.56 R6.1@1580,2617.56 cw(c1658.32,2539.24) 1658.32,2650 2043.08,2650 cw(c2043.08,2428.08) 2200,2585 ccw(c2356.92,2741.92) 2356.92,2520 v2(2650,2520) ; v2(2785,2520) cw(c2785,2302.72) 2938.64,2456.36 2960,2435 cw(c2912.86,2387.86) 2975,2412.01 cw(c2912.86,2387.86) 2979.53,2387.86 U1.29@2979.53,2289.45
  Power w6: v2(2650,2520) v2(2785,2520)
"RF IN_ATTEN3": C28.2 U51_ATTEN3.2 | length 86.4
  Top Layer w8: 5166.64,1460.46 U51_ATTEN3.2@5196.36,1460.46
  Top Layer w13.45: C28.2@5110,1460.46 5166.64,1460.46
"RF IN_ATTEN4": C30.2 U51_ATTEN4.2 | length 127.4
  Top Layer w8: 5097.64,2899.68 U51_ATTEN4.2@5127.36,2899.68
  Top Layer w13.45: C30.2@5000,2899.68 5097.64,2899.68
"RF OUT": C29.2 P2.1 | length 411
  Top Layer w13.45: C29.2@5479.02,1460 P2.1@5890,1460
"RF OUT_ATTEN3": C29.1 U51_ATTEN3.14 | length 96.7
  Top Layer w8: U51_ATTEN3.14@5341.64,1460.46 5371.36,1460.46
  Top Layer w13.45: 5373.98,1460.46 C29.1@5440.98,1460.46
"RF OUT_ATTEN4": C31.1 U51_ATTEN4.14 | length 125.7
  Top Layer w8: U51_ATTEN4.14@5272.64,2899.68 5302.36,2899.68
  Top Layer w13.45: 5304.98,2899.68 C31.1@5400.98,2899.68
RF_1: C32.1 X3.10 | length 111
  Top Layer w13.45: X3.10@4210,3340 C32.1@4320.98,3340
RF_2: C33.1 X2.10 | length 111
  Top Layer w13.45: X2.10@4210,2640 C33.1@4320.98,2640
RXD: R8.2 U1.44 | length 268.5
  Top Layer w6: R8.2@2527.56,2080 cw(c2576.98,2030.58) 2576.98,2100.47 U1.44@2790.55,2100.47
RXLED: RU4.2 U4.14 | length 341.2
  Top Layer w10: RU4.2@2092.56,2170 2130,2132.56 v3(2130,2110) ; v3(2257.5,2033.03) 2296.97,2033.03 2307.5,2022.5 U4.14@2307.5,1970.59
  Power w10: v3(2130,2110) 2206.97,2033.03 v3(2257.5,2033.03)
SCL: J1.2 LC10.3 RP1.1 TPI2C.2 U1.28 U7.3 | length 3131.3
  Top Layer w6: LC10.3@1743.31,3340 1743.31,3306.69 ccw(c1920,3306.69) 1920,3130 1985,3130 cw(c1985,3080) 2035,3080 v2(2035,3047) ccw(c2178.47,3047) 2077.02,2945.55 2185.65,2836.92 ccw(c2480,3131.27) 2480,2715 2552.89,2715 cw(c2552.89,2215) 2607.54,2712.01 cw(c2552.89,2215) 2906.45,2568.55 v2(3055,2420) 3014.24,2379.24 ccw(c3090,2329.21) 2999.21,2329.21 U1.28@2999.21,2289.45 ; v2(3166.55,2360) 3340,2360 cw(c3340,2305) 3395,2305 3395,2240 ccw(c3455,2240) 3397.66,2222.34 ccw(c3455,2240) 3437.34,2182.66 ccw(c3455,2240) 3455,2180 cw(c3455,2107.57) 3506.21,2158.79 3515,2150 ccw(c3587.43,2222.43) 3587.43,2120 3640,2120 cw(c3640,2060) 3700,2060 TPI2C.2@3700,1920 J1.2@3700,1807.56
  Top Layer w7: v2(2099.88,3047.2) U7.3@2157.32,3047.2
  Power w6: v2(3055,2420) 3115,2360 v2(3166.55,2360)
  Gnd 2 w7: v2@2037.2,3047.2 v2(2099.88,3047.2)
SDA: J2.2 LC9.1 RP2.1 TPI2C.1 U1.31 U7.4 | length 3388.8
  Top Layer w6: LC9.1@1743.31,3440 cw(c1743.31,3363.31) 1820,3363.31 1820,3265 ccw(c1930,3265) 1930,3155 1985,3155 cw(c1985,3075) 2065,3075 2065,3021.61 ; U7.4@2157.32,3021.61 2065,3021.61 ; U1.31@2940.16,2289.45 v2(2940.16,2410.16) ; v2(3025,2495) 2921.45,2598.55 ccw(c2567.89,2245) 2629.29,2741.22 ccw(c2567.89,2245) 2567.89,2745 2517.11,2745 cw(c2517.11,3245) 2163.55,2891.45 2087.35,2967.65 cw(c2141.32,3021.61) 2065,3021.61 ; v2(3195,2395) 3340,2395 cw(c3340,2320) 3385,2380 cw(c3340,2320) 3400,2365 cw(c3340,2320) 3415,2320 3415,2250 ccw(c3460,2250) 3419.39,2230.61 ccw(c3460,2250) 3440.61,2209.39 ccw(c3460,2250) 3460,2205 3461.11,2205 cw(c3461.11,2111.11) 3527.5,2177.5 ccw(c3593.89,2243.89) 3593.89,2150 3725,2150 cw(c3725,2075) 3800,2075 TPI2C.1@3800,1920 J2.2@3800,1807.56
  Power w6: v2(2940.16,2410.16) v2(3025,2495) 3125,2395 v2(3195,2395)
"SWEEP OUT": C31.2 P3.1 | length 435
  Top Layer w13.45: 5455,2900 P3.1@5890,2900
TCK: JTAG.4 R2.1 U1.40 | length 1961.4
  Top Layer w6: JTAG.4@1310,2830 1417.57,2830 ccw(c1417.57,2932.43) 1489.98,2859.98 1497.55,2867.55 cw(c1570,2795.1) 1497.59,2867.59 cw(c1587.91,2777.26) 1587.91,2905 1980,2905 cw(c1980,2784.29) 2065.33,2869.67 2125.04,2809.96 ccw(c2475,3159.91) 2475,2665 2525,2665 cw(c2525,2465) 2591.53,2653.61 cw(c2525,2465) 2714.1,2530.13 cw(c2525,2465) 2725,2465 2725,2210 ccw(c2755.79,2210) 2755.79,2179.21 U1.40@2790.55,2179.21
TDI: JTAG.8 R4.1 U1.25 | length 1957.6
  Top Layer w6: JTAG.8@1310,2730 1392.57,2730 cw(c1392.57,2627.57) 1465,2700 ccw(c1525.36,2760.36) 1525.36,2675 2078.68,2675 cw(c2078.68,2478.68) 2217.5,2617.5 ccw(c2356.32,2756.32) 2356.32,2560 v2(2615,2560) ; v2(2825,2560) cw(c2825,2463.43) 2893.28,2531.72 v2(3005,2420) ; U1.25@3058.27,2289.45 3058.27,2335 v2(3073.27,2350)
  Power w6: v2(2615,2560) v2(2825,2560) ; v2@3005,2418.27 v2(3073.27,2350)
TDO: JTAG.6 U1.37 | length 1899.1
  Top Layer w6: JTAG.6@1310,2780 1660.75,2780 ccw(c1660.75,2959.25) 1787.47,2832.47 ; 1787.53,2832.53 cw(c1914.25,2705.75) 1914.25,2885 1980,2885 cw(c1980,2776.36) 2056.82,2853.18 2142.72,2767.28 ccw(c2450,3074.56) 2450,2640 2545,2640 cw(c2545,2500) 2585.29,2634.08 cw(c2545,2500) 2685,2500 v2(2685,2475) ; v2(2780,2425) 2780,2238.27 U1.37@2790.55,2238.27
  Power w6: v2(2685,2475) 2710,2450 2755,2450 v2(2780,2425)
TMS: JTAG.2 R3.1 U1.39 | length 1977.8
  Top Layer w6: JTAG.2@1310,2880 1360.5,2880 ccw(c1360.5,2999.5) 1445,2915 cw(c1559.53,2800.47) 1559.53,2962.44 R3.1@1580,2962.44 ccw(c1670.39,3052.83) 1670.39,2925 1980,2925 cw(c1980,2792.22) 2073.89,2886.11 2123.55,2836.45 ccw(c2477.11,3190) 2477.11,2690 2535,2690 cw(c2535,2482.32) 2571.44,2686.78 cw(c2535,2482.32) 2742.32,2494.47 cw(c2535,2482.32) 2742.68,2482.32 2742.68,2215 ccw(c2758.78,2215) 2758.78,2198.9 U1.39@2790.55,2198.9
TXD: R1.2 U1.43 | length 268.3
  Top Layer w6: R1.2@2527.56,2140 ccw(c2575.46,2187.9) 2575.46,2120.16 U1.43@2790.55,2120.16
TXLED: RU3.2 U4.7 | length 166.9
  Top Layer w10: RU3.2@2092.56,2230 2187.5,2230 cw(c2187.5,2210) 2207.5,2210 U4.7@2207.5,2169.41
U3V3: CU2.2 CU3.2 DRX.1 DTX.1 U4.3 U4.10 | length 1109.8
  Top Layer w10: DRX.1@1740,2430 2142.5,2430 cw(c2142.5,2265) 2307.5,2265 U4.3@2307.5,2169.41 2307.5,2082.5 2290,2065 2250,2065 2207.5,2022.5 U4.10@2207.5,1970.59 2207.5,1909.94 CU2.2@2187.56,1890
USB_N: CR3.1 RU6.1 USBMCU.2 | length 458
  Top Layer w10: USBMCU.2@1639.37,1869.21 CR3.1@1751.65,1869.21 ; CR3.1@1750,1867.56 CR3.1@1751.65,1869.21 ; RU6.1@2046.65,1944.21 ccw(c2046.65,1950) RU6.1@2052.44,1950 1910,1950 1835,1875 1757.44,1875 CR3.1@1751.65,1869.21
USB_P: CR4.1 RU5.1 USBMCU.3 | length 587.4
  Top Layer w10: USBMCU.3@1560.63,1869.21 1636.42,1945 1685,1945 1707.56,1922.44 CR4.1@1750,1922.44 1772.44,1900 1825,1900 1900,1975 2017.44,1975 RU5.1@2052.44,2010
VDDCORE: C8.2 C9.2 C10.2 C11.2 C14.2 pad.0 U1.8 U1.18 U1.41 U1.48 | length 1549.1
  Top Layer w8: C14.2@2697.56,2175 2713.03,2159.53 U1.41@2790.55,2159.53 2937.87,2159.53 pad.0@2975.51,2121.88 ; C11.2@2790,1897.56 2770,1917.56 2770,2021.73 U1.48@2790.55,2021.73 2877.09,2021.73 pad.0@2975.51,2120.16 pad.0@2977.24,2120.16 ; v3(3008.53,2193.53) 2975.51,2160.51 2975.51,2150 pad.0@2975.51,2121.88 ; C8.2@3010,1817.56 2979.53,1848.03 U1.8@2979.53,1970.55 2979.53,2117.87 pad.0@2977.24,2120.16 ; v3(3101.1,2286.1) 3172.95,2286.1 C9.2@3181.85,2295 ; C10.2@3222.44,2110 3212.28,2120.16 pad.0@2977.24,2120.16 ; pad.0@2975.51,2121.88 pad.0@2977.24,2120.16
  Gnd 2 w8: v3(3008.53,2193.53) v3(3101.1,2286.1)
pads on no net: HEATER.0 JTAG.7 POWER.0 U1.12 U1.14 U1.15 U1.30 U1.35 U1.36 U1.38 U2.1 U4.2 U4.6 U4.11 U4.15 U4.16 U8.10 U51_ATTEN3.7 U51_ATTEN3.8 U51_ATTEN4.0 U51_ATTEN4.7 U51_ATTEN4.8 VR1.0 VR3.0

## Polygon pours and split planes (outlines as drawn)
GND on Top Layer "Bottom Layer-No Net" (solid, pour order 16): 5264,1507.07 5274,1507.07 5274,1572.07 5304,1602.07 5304,1708.21 5234,1708.21 5234,1602.07 5264,1572.07
GND on Top Layer "Bottom Layer-No Net" (solid, pour order 14): 5416.46,1368.32 5359,1425.77 5329,1425.77 5329,1380.77 5309,1380.77 5309,1215.77 5416.46,1215.77
GND on Top Layer "Bottom Layer-No Net" (solid, pour order 13): 5347.46,2807.54 5290,2865 5260,2865 5260,2820 5240,2820 5240,2655 5347.46,2655
GND on Top Layer "Bottom Layer-No Net" (solid, pour order 15): 5195,2946.3 5205,2946.3 5205,3011.3 5235,3041.3 5235,3147.44 5165,3147.44 5165,3041.3 5195,3011.3
GND on Top Layer "Bottom Layer-No Net" (solid, pour order 10): 3568.19,2273.19 3568.19,3765.32 4838.75,3765.32 4850,3765.32 4850,2775 4850,2273.19 4500.2,2273.19
GND on Gnd 2 "Gnd" (solid, pour order 9): 1050,550 5950,550 5950,4650 1050,4650 1050,639.13 1050,550
GND on Gnd 1 "Bottom Layer-No Net" (solid, pour order 11): 1050,550 5950,550 5950,4650 1050,4650 1050,655.13
3V3 on Power "Bottom Layer-No Net" (solid, pour order 12): 1050,550 1050,4650 5950,4650 5950,550 1080,550

## Keep-outs
Keep-Out Layer:
  the board outline again, w10

## Other copper
Top Layer:
  region net GND: 4175,1585 4175,1425 4300,1425 4300,1585
  rectangle net GND: 4657.56,1745 4742.56,1875
  region net GND: 4905,1585 4580,1585 4580,1535 4905,1535
  region net GND: 4885,1760 4885,1550 5040,1550 5040,1760
  rectangle net GND: 3135,4062.8 3485,4352.8
  pour cut-out: 3955,2895 3955,2990 4055,2990 4055,2895
  pour cut-out: 3750,2690 3655,2690 3655,2790 3750,2790
  pour cut-out: 3750,3390 3655,3390 3655,3490 3750,3490
  pour cut-out: 3955,3595 3955,3690 4055,3690 4055,3595
  pour cut-out: 4150,2740 4150,2540 4575,2540 4575,2825 4400,2825 4400,2740
  pour cut-out: 4125,3240 4125,3440 4570,3440 4570,3150 4400,3150 4400,3240
  pour cut-out: 4830,2900 4575,2900 4575,3075 4830,3075
  region net 3V3: 4600,1870 4495,1870 4435,1810 4435,1740 4600,1740

## Silkscreen, mask and mechanical layers (free items; w line width, h text height)
Top Overlay:
  the board outline again, w10
  text "+" at 1540,3875 h60 r90
  text "-" at 1540,3775 h60 r90
  text "5V" at 3215,3600 h60
  text "12V" at 3185,3385 h60
  text "EORE Controller" at 4520,885 h100
  text "Tigger board" at 4560,805 h50
  text "R5," at 4565,730 h40
  text ".Print_Date" at 4770,730 h40
  text "15V+" at 2015,675 h60 r90
  text "C. Wolf" at 4565,650 h40
  text ".VersionControl_RevNumber" at 4855,650 h40
  text "3.3V+" at 1720,620 h60 r90
Top Paste:
  the board outline again, w8
Top Solder:
  pour cut-out: 5415,1435.01 5505,1435.01 5505,1485.01 5415,1485.01
  pour cut-out: 5045,1435.01 5135,1435.01 5135,1485.01 5045,1485.01
Bottom Solder:
  pour cut-out: 5379.98,1740.77 5379.98,1690.77 5329.98,1690.77 5329.98,1740.77
  pour cut-out: 5397.56,1263 5397.56,1213 5347.56,1213 5347.56,1263
  pour cut-out: 5310.98,3180 5310.98,3130 5260.98,3130 5260.98,3180
Mechanical 2:
  lines w8: 1000,500 1000,4700 6000,4700 6000,4695 6000,500 1000,500

## Dimensions
1000,500 to 6000,500 on Mechanical 1
1000,4700 to 1000,500 on Mechanical 1

## Text inside footprints (layer, text, board x,y; h text height)
JTAG: Top Overlay "9" at 1240,2624.09 h39.37 r270; Top Overlay "1" at 1240,2942.99 h39.37 r270
P2: Mechanical 1 "Board Edge" at 6060,1730 h60 r270
P3: Mechanical 1 "Board Edge" at 6060,3170 h60 r270